# Altium PCB ALtiumSTM32_PCB.PcbDoc
Units mm, origin at the board's own origin, x right, y up, seen from the top; angles counter-clockwise.
Board outline 37.6 x 36.7 mm, 4 copper layers (L1 (Signal), L2 (GND), L3 (GND), L4 (Signal)), stack 1.57 mm thick; 35 components, 27 nets, 172 pads, 117 vias.
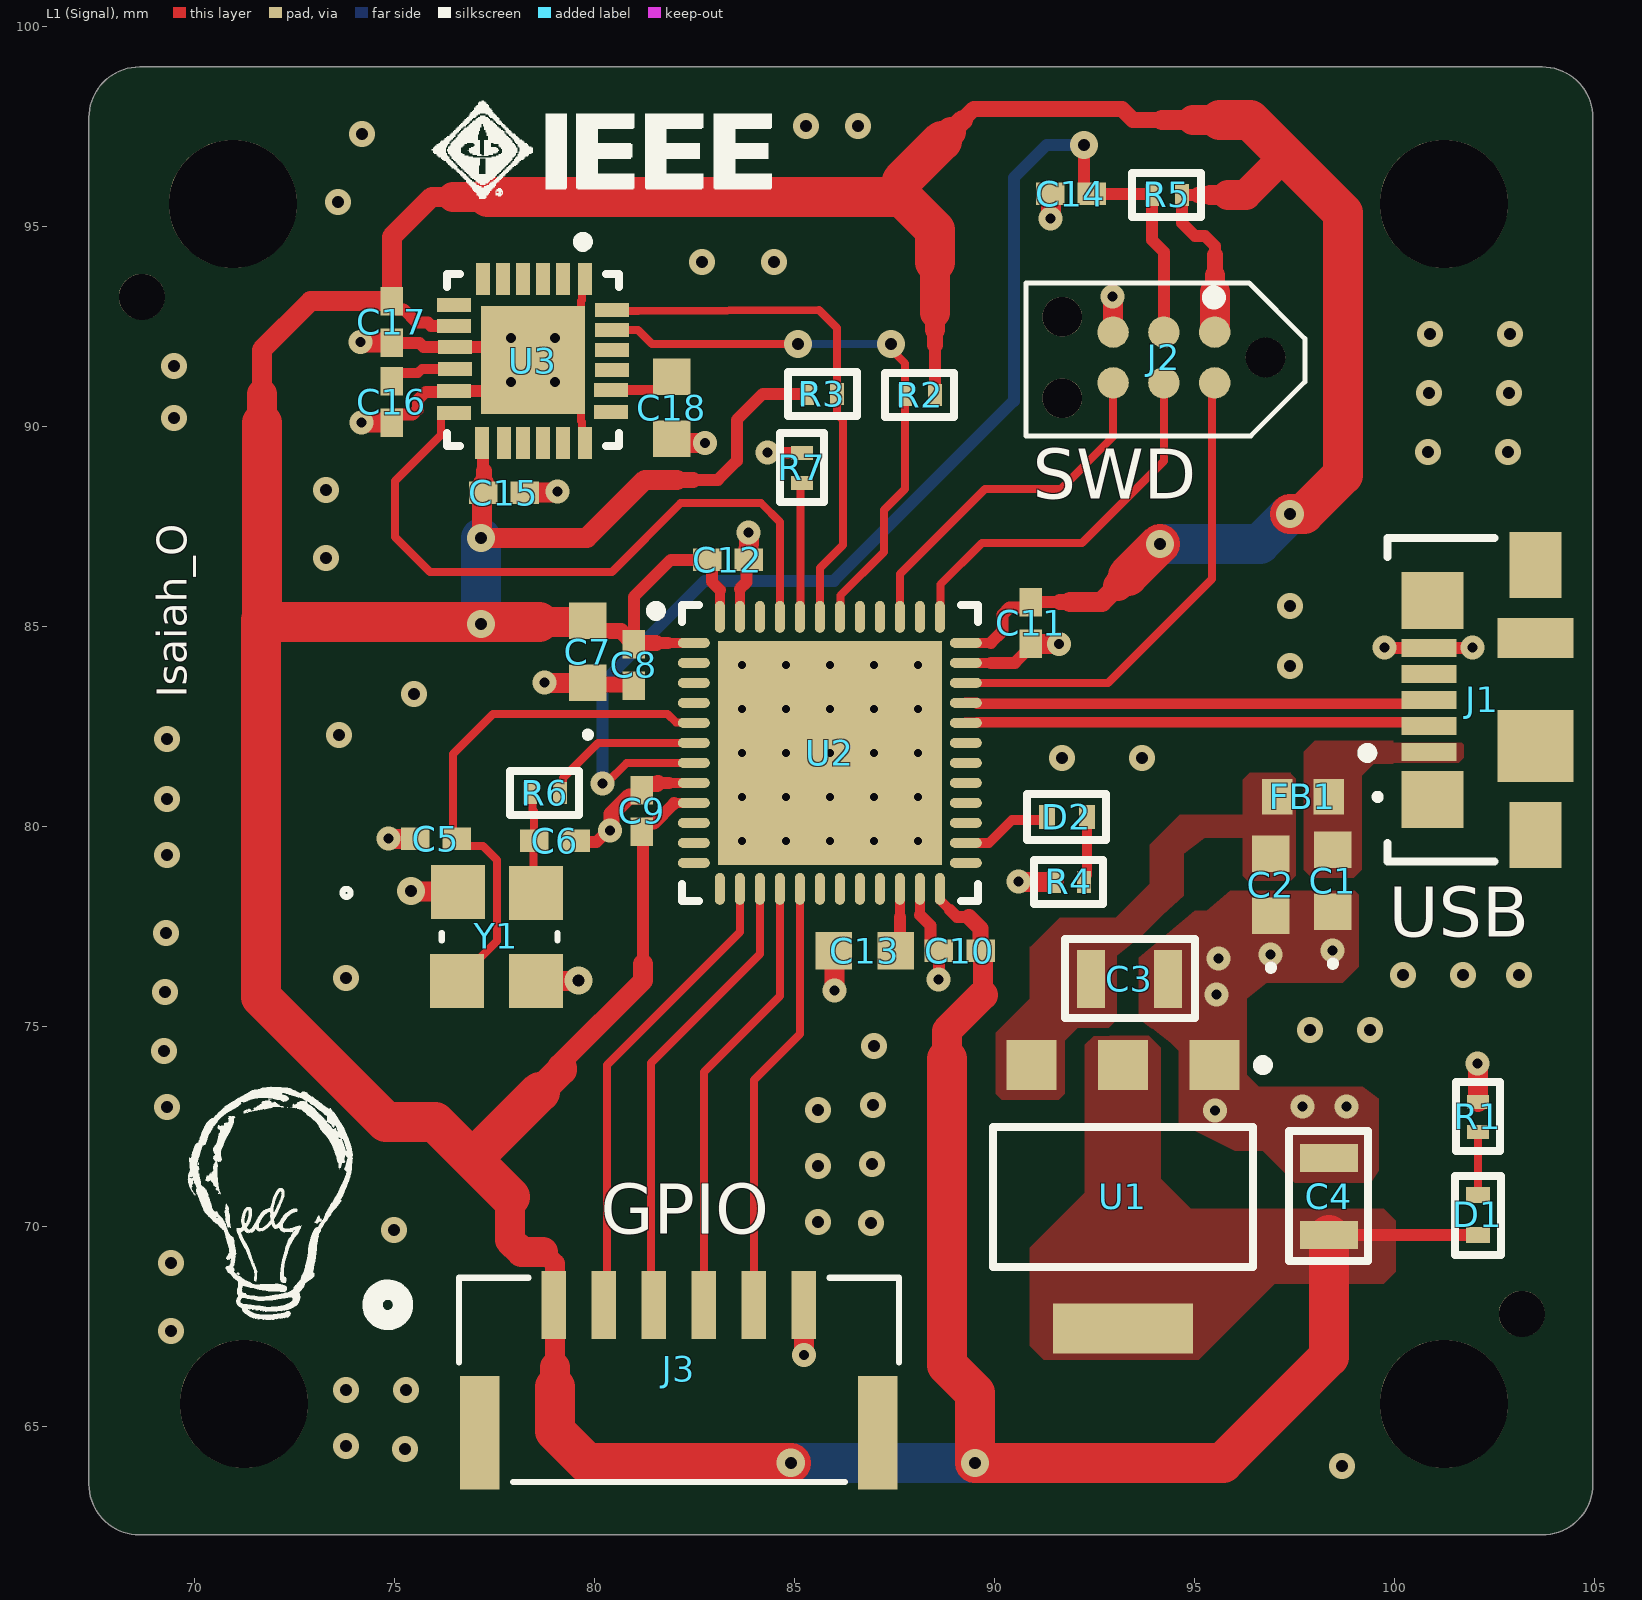
[diagram p0: L1 (Signal) view]
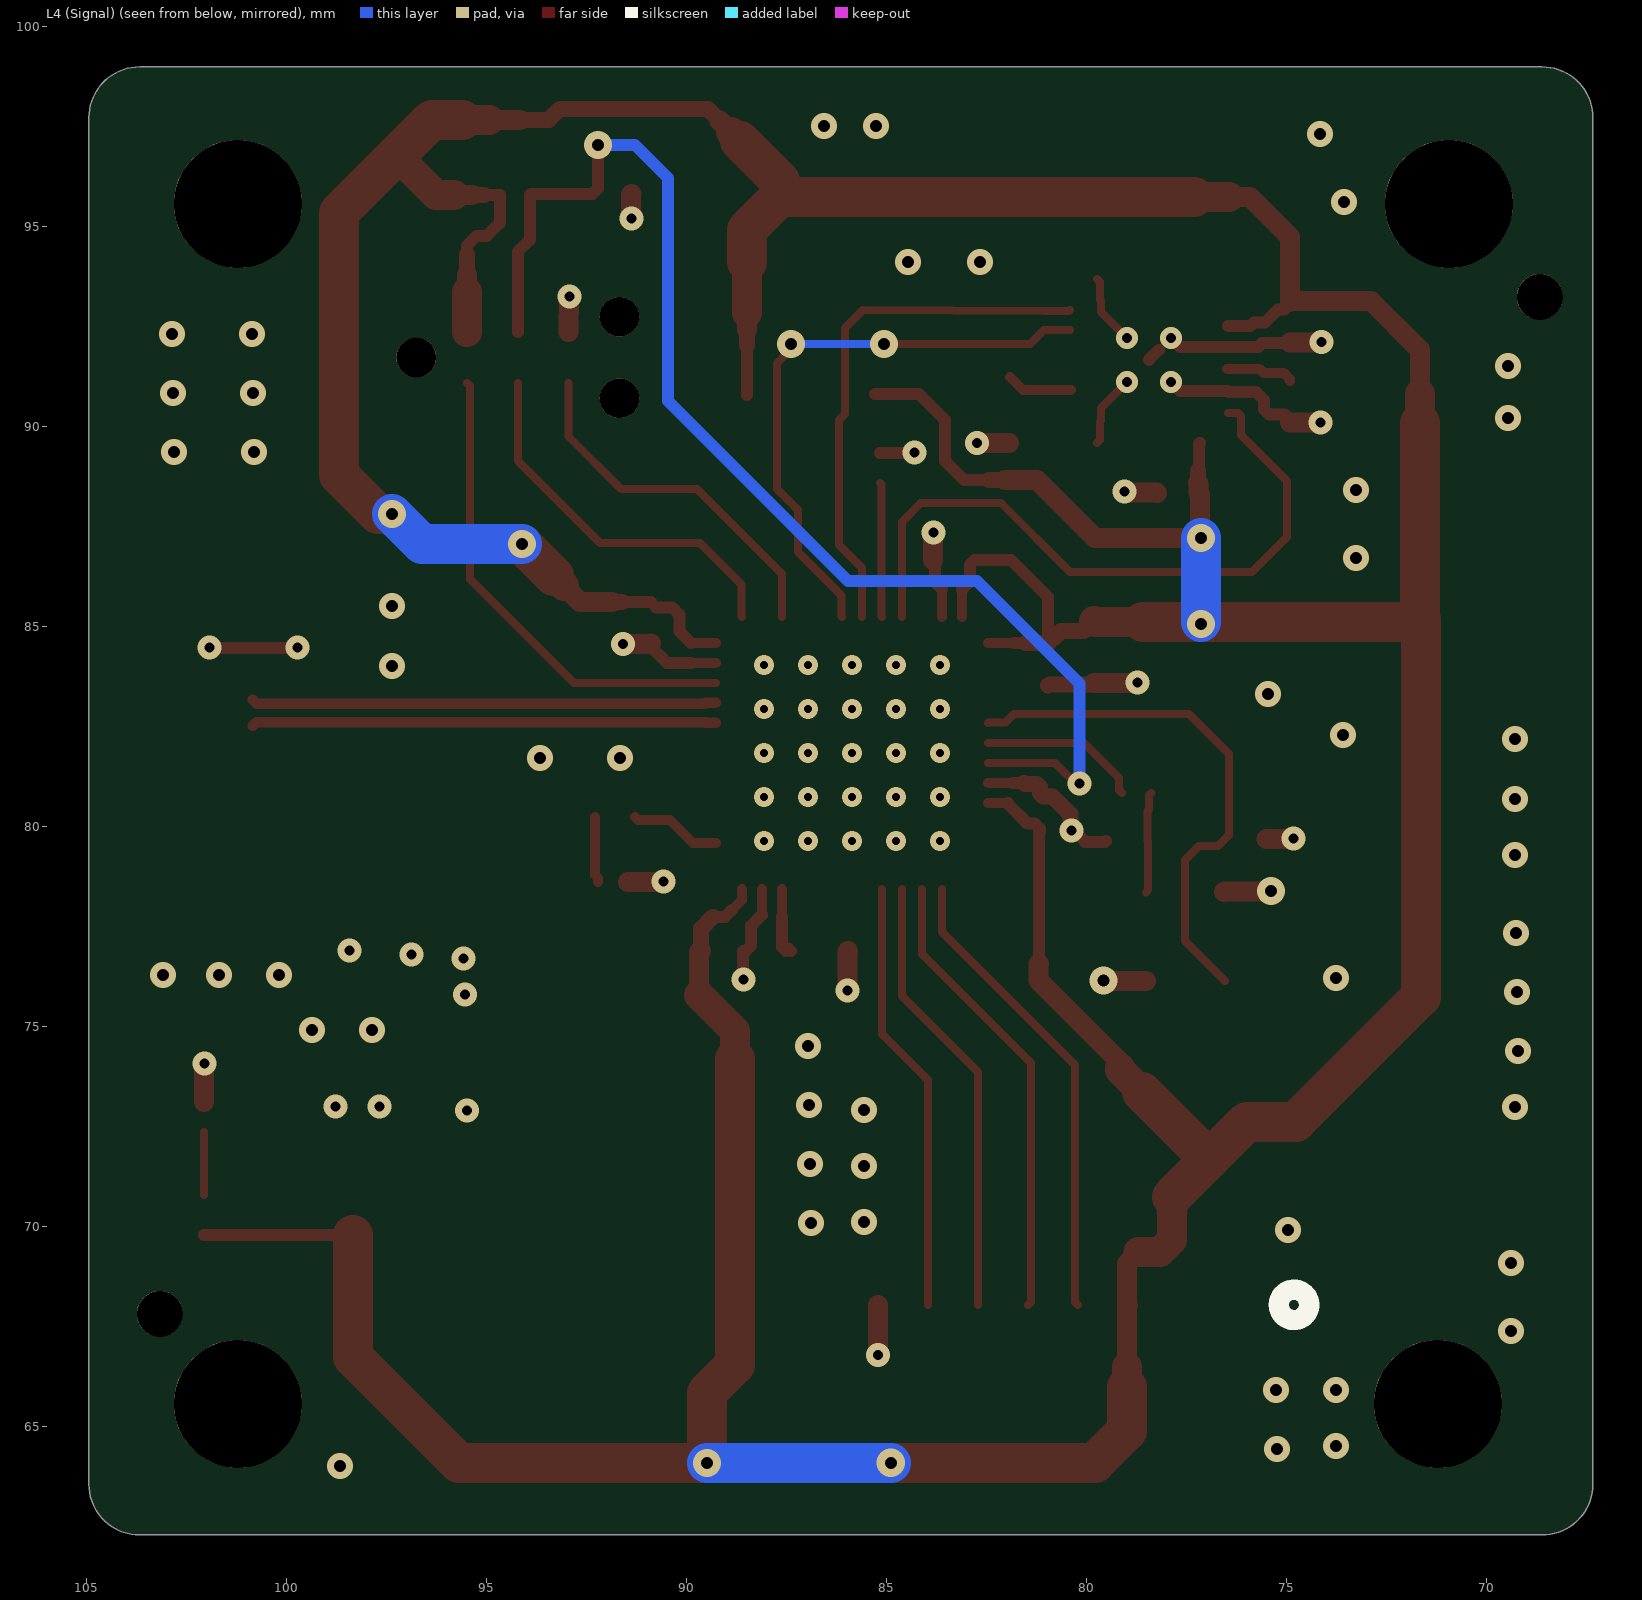
[diagram p1: L4 (Signal) view, seen from below]
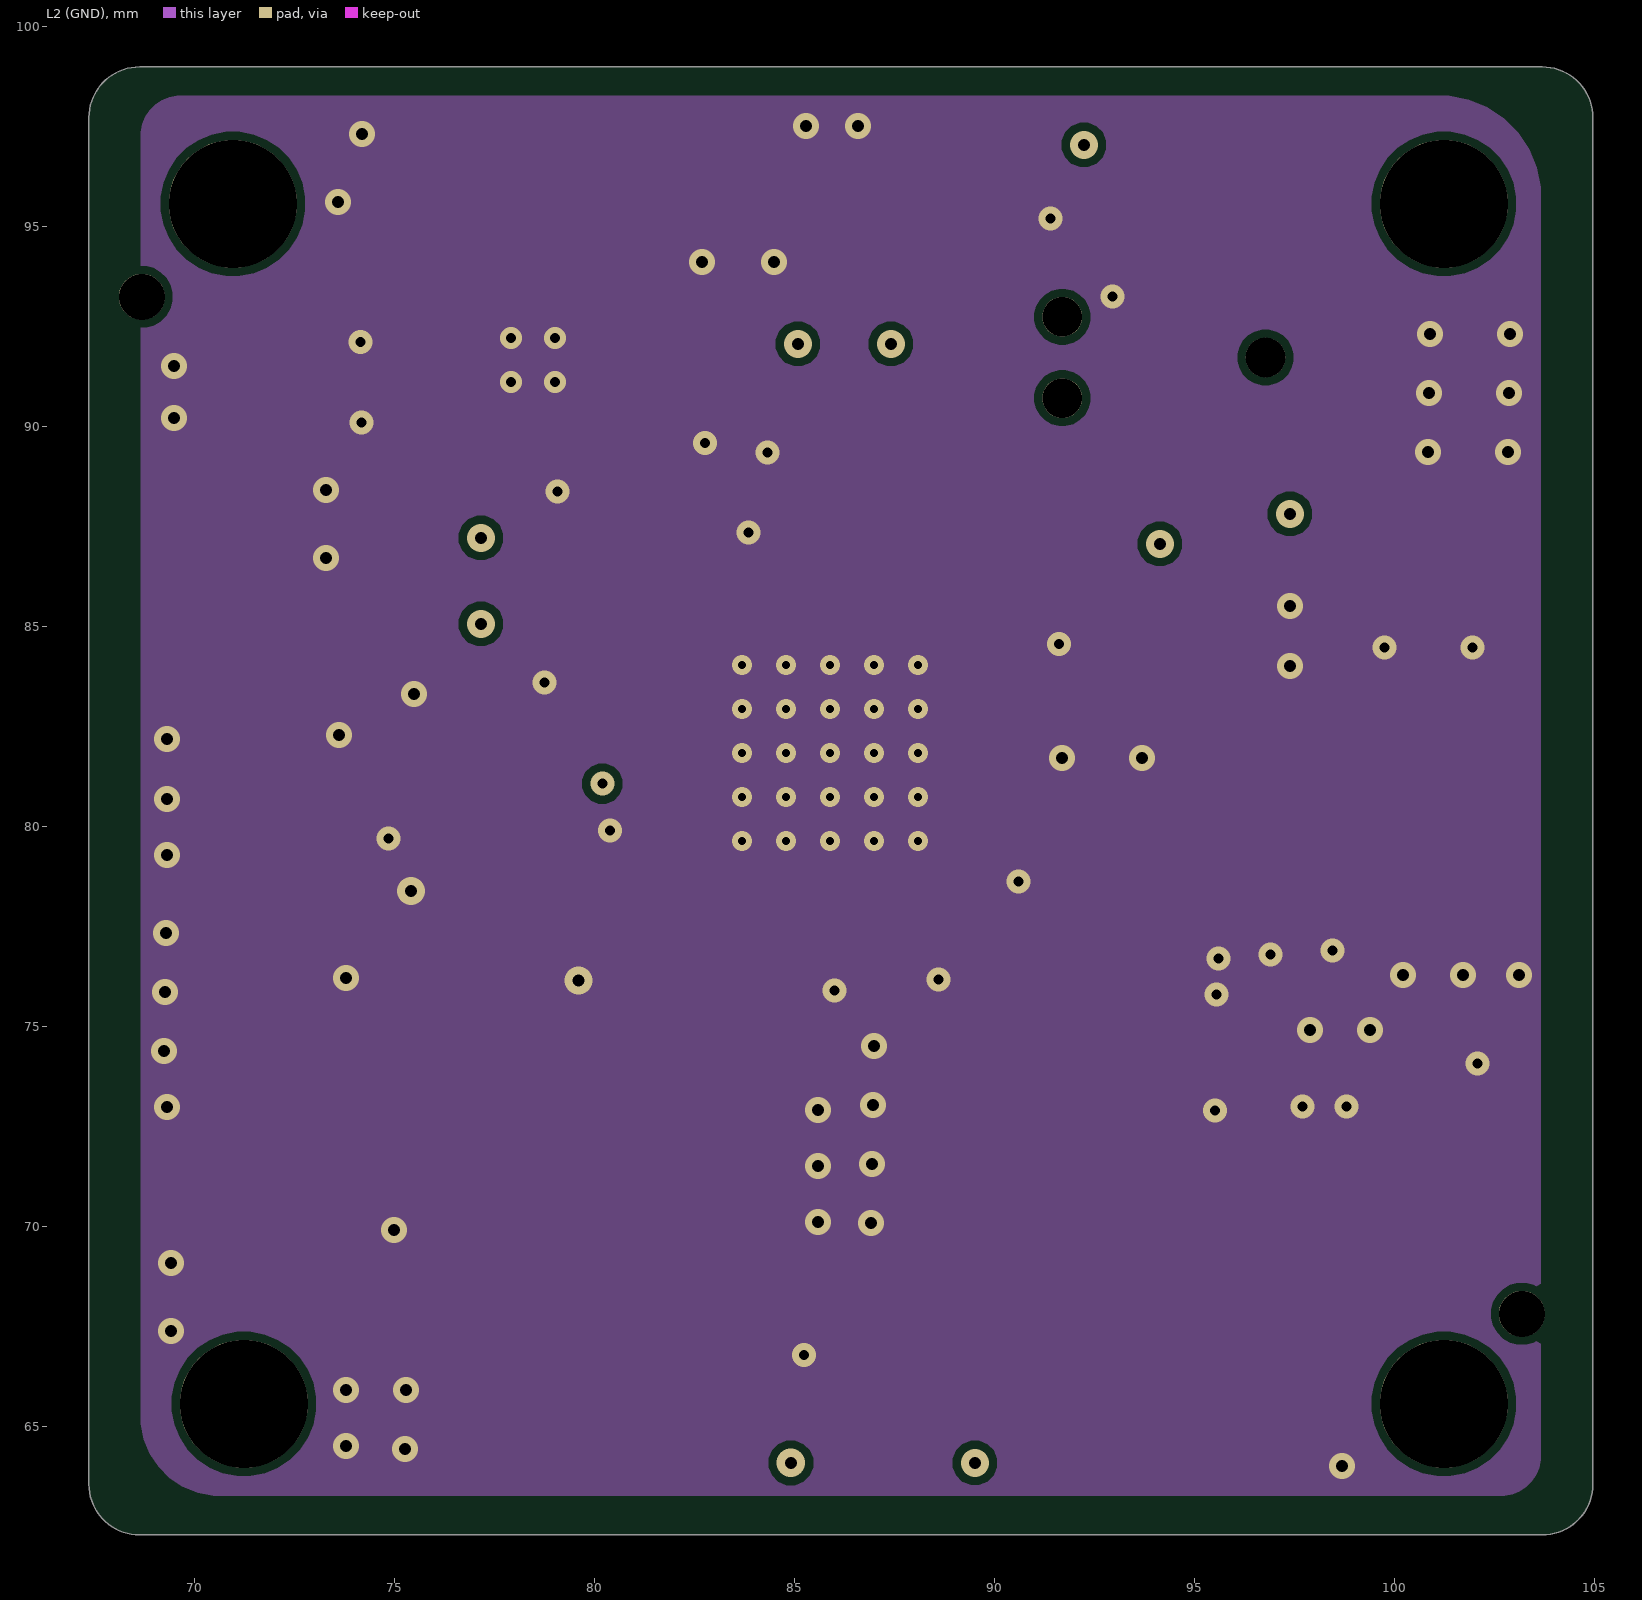
[diagram p2: L2 (GND)]
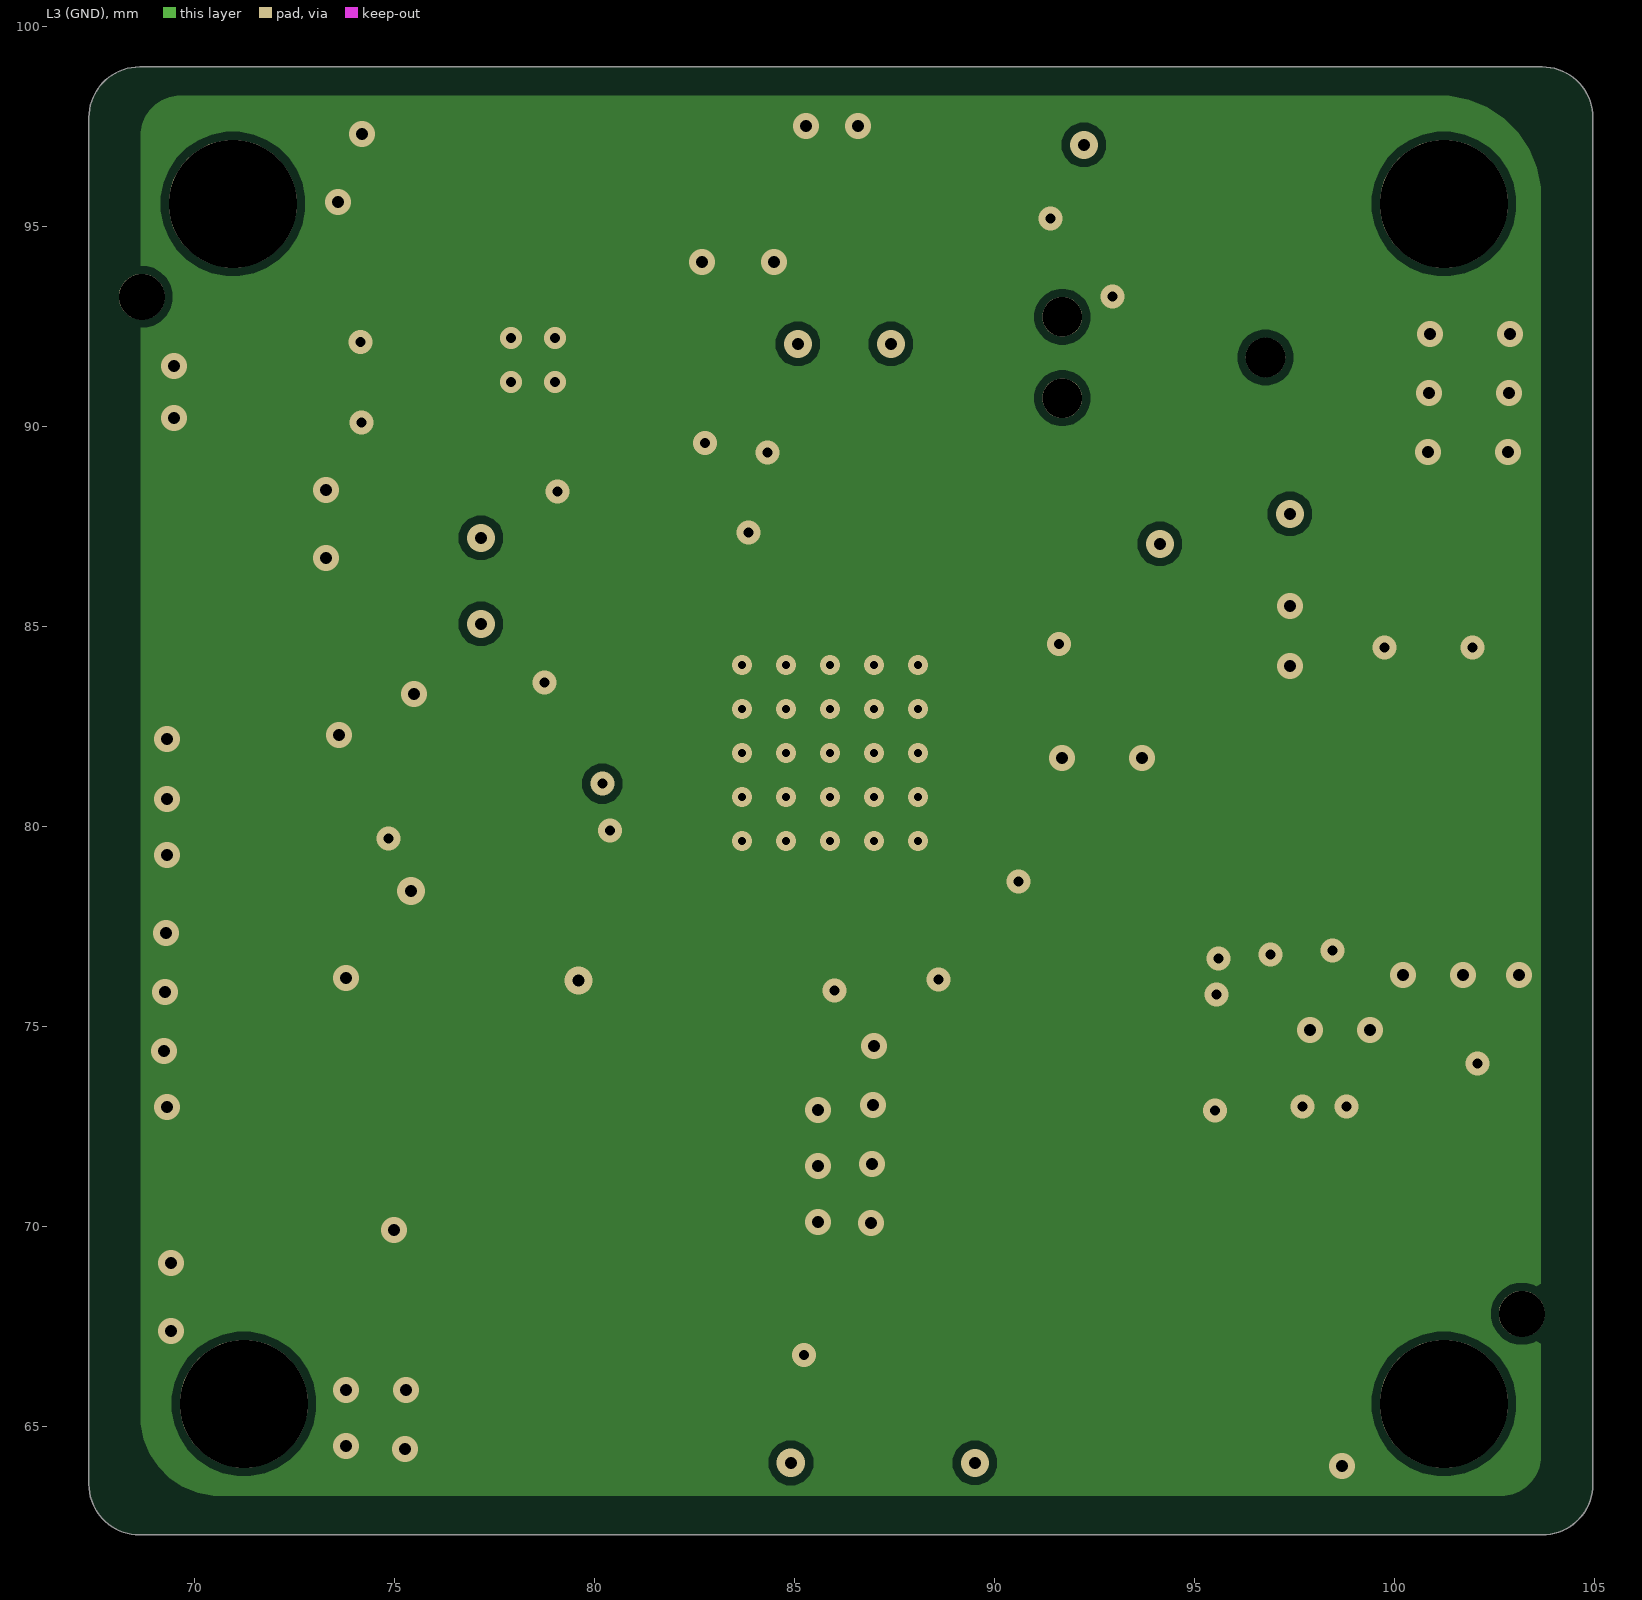
[diagram p3: L3 (GND)]
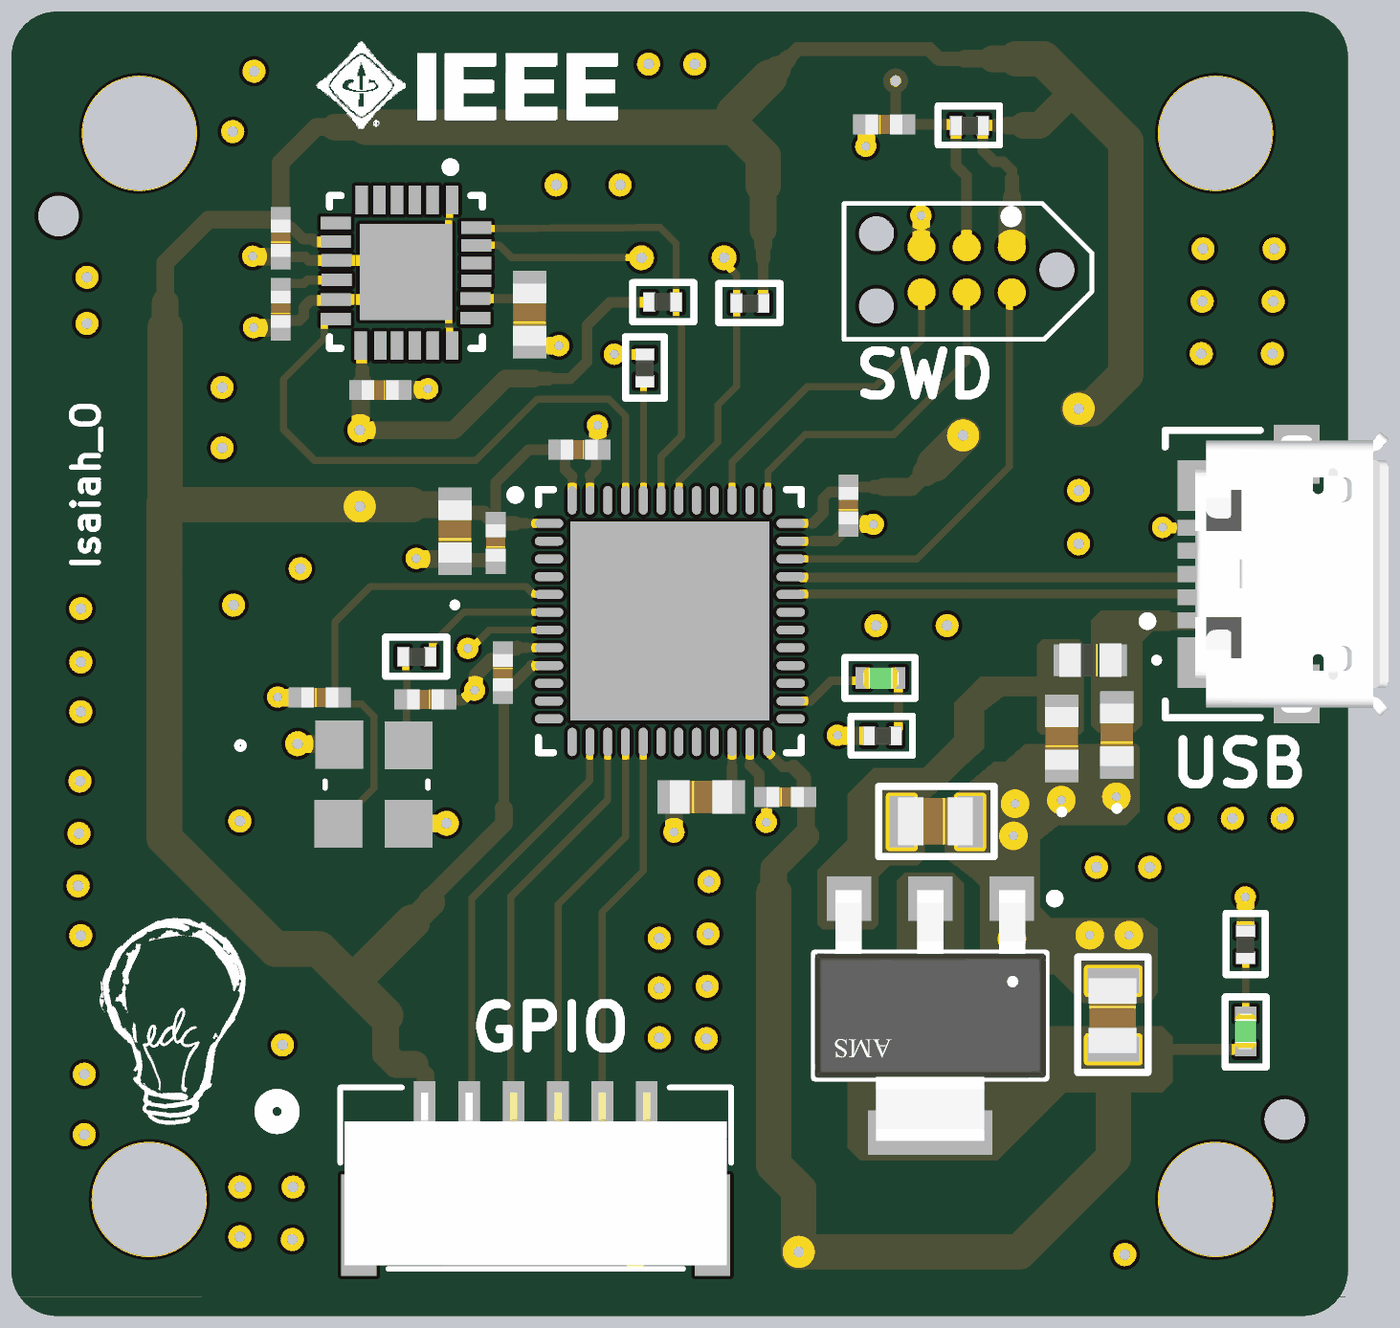
[diagram p4: 3D render of the assembled board from above, using the file's embedded part models]

## Layer stack, top to bottom
Top Solder: solder mask 0.0254, SM-001, Dk 4
L1 (Signal): signal copper 0.035
Dielectric 1: prepreg 0.2, PP-017, Dk 4.6
L2 (GND): signal copper 0.0175
Dielectric 3: core 1.065, Core-039, Dk 4.6
L3 (GND): signal copper 0.0175
Dielectric 5: prepreg 0.2, PP-017, Dk 4.6
L4 (Signal): signal copper 0.035
Bottom Solder: solder mask 0.0254, SM-001, Dk 4

## Board outline
67.35,63.57 ccw(c68.62,63.57) 68.62,62.3 103.68,62.3 ccw(c103.68,63.57) 104.95,63.57 104.95,97.73 ccw(c103.68,97.73) 103.68,99 68.62,99 ccw(c68.62,97.73) 67.35,97.73

## Design rules (kind name [scope] priority, off if disabled: settings)
Clearance [All] p1: gap=0.2 ignorepadtopadclearanceinfootprint=FALSE except(0: Arc-Hole Track-Hole SMDPad-Hole THPad-Hole Via-Hole Fill-Hole Poly-Hole Region-Hole Text-Hole)
DiffPairsRouting [All] p1: maxlimit=0.254 minlimit=0.203 mostfreqgap=0.254 toplayer_maxgap=0.203 toplayer_prefgap=0.203 toplayer_minwidth=0.26 toplayer_maxwidth=0.26 toplayer_prefwidth=0.26 bottomlayer_maxgap=0.203 bottomlayer_prefgap=0.203 bottomlayer_minwidth=0.26 bottomlayer_maxwidth=0.26 bottomlayer_prefwidth=0.26 impedanceprofiledriven=TRUE impedanceprofileid={747E20D5-6B99-424C-B61D-0ADEAD03E9EC} impedanceprofilevalue=90.000000 maxuncoupledlength=12.7
PolygonConnect [All] p1: connectstyle=Direct reliefconductorwidth=0.254 reliefentries=4 polygonreliefangle="90 Angle" airgapwidth=0.254
RoutingVias [All] p1: holewidth=0.3 width=0.7 viastyle="Through Hole" minholewidth=0.25 minwidth=0.55 maxholewidth=0.4 maxwidth=0.9
SolderMaskExpansion [All] p1: expansion=0.102 istentingtop=FALSE
UnRoutedNet [All] p1: checkbadconnections=TRUE
Width [All] p1: maxlimit=1 minlimit=0.2 preferedwidth=0.3 midlayer1_minwidth=0.254 midlayer1_maxwidth=0.254 midlayer1_prefwidth=0.254 midlayer2_minwidth=0.254 midlayer2_maxwidth=0.254 midlayer2_prefwidth=0.254 minimp=50.000000 maximp=50.000000 favimp=50.000000
28 further rules are at their usual default settings.

## Classes and differential pairs
differential pair class DIFF_USB: USB_D
differential pair USB_D: +USB_D_P -USB_D_N

## Components (designator, comment, footprint, x,y, rotation, side; value= is the part's Value field where it differs from the comment)
C1 "2u2" CAP_0603_X_WAL 98.45,78.65 r90 top
C2 "2u2" CAP_0603_X_WAL 96.9,78.55 r90 top
C3 "22u" C0805 93.35,76.2 r180 top
C4 "22u" C0805 98.35,70.75 r270 top
C5 "10p" CAP_CL_05_SAM_0402 76.025,79.7 r0 top
C6 "10p" CAP_CL_05_SAM_0402 79,79.65 r180 top
C7 "2u2" CAP_0603_X_WAL 79.825,84.375 r90 top
C8 "100n" CAP_CL_05_SAM_0402 80.975,84.05 r90 top
C9 "100n" CAP_CL_05_SAM_0402 81.175,80.4 r270 top
C10 "100n" CAP_CL_05_SAM_0402 89.121,76.9 r0 top
C11 "100n" CAP_CL_05_SAM_0402 90.9,85.1 r90 top
C12 "100n" CAP_CL_05_SAM_0402 83.325,86.675 r180 top
C13 "2u2" CAP_0603_X_WAL 86.75,76.9 r0 top
C14 "100n" CAP_CL_05_SAM_0402 91.9,95.825 r0 top
C15 "100n" CAP_CL_05_SAM_0402 77.725,88.35 r180 top
C16 "100n" CAP_CL_05_SAM_0402 74.925,90.625 r90 top
C17 "10n" CAP_CL_05_SAM_0402 74.925,92.625 r90 top
C18 "2u2" CAP_0603_X_WAL 81.925,90.475 r90 top
D1 "LED-0403-LED" D0402 102.075,70.3 r90 top
D2 "LED-0402-RED" D0402 91.8,80.25 r0 top
FB1 "120R" IND_BLM18_0603_MUR-L 97.702,80.75 r180 top
J1 "473460001" FP-473460001-MFG 103.16,83.175 r90 top
J2 "DNP" TAG_TC2030-IDC-NL 94.225,91.735 r180 top
J3 "SM068-GHS-TB" CONN_SM06B-GHS-TB_JST 82.1,66.175 r0 top
R1 "10k" R0402 102.075,72.75 r270 top
R2 "2k2" R0402 88.125,90.8 r0 top
R3 "2k2" R0402 85.675,90.825 r180 top
R4 "1k" R0402 91.85,78.625 r0 top
R5 "10k" R0402 94.3,95.8 r0 top
R6 "0R" R0402 78.75,80.85 r0 top
R7 "10k" R0402 85.175,88.975 r270 top
U1 "AMS1117-3.3" FP-AMS1117-IPC_C 93.2,70.75 r270 top
U2 "STM32F411CEU6" STM-UFQFPN48_L 85.875,81.85 r0 top
U3 "MPU-6050" IS-QFN-24_V 78.45,91.675 r270 top
Y1 "24MHz" "TSX-3225 24.0000MF20G-AC3_EPS-L" 77.62,77.25 r0 top

## Footprints (in the part's own frame and the unit in brackets; to place one, negate y for a bottom-side part, rotate by r counter-clockwise, add the part's x,y. Pads: shape width x height; smd on the part's side, far side on the other; paste and mask are expansions set on the pad)
C0805 [mm]
  rect 0.7x1.45 smd: 1(-0.975,0) 2(0.95,0)
  silkscreen extent -1.65,-1 1.6,0.97, body extent -1.05,-0.69 1.06,0.65, height 1.35
CAP_0603_X_WAL [mil]
  rect 36x37 smd paste+0 mask+0: 1(-30.5,0) 2(30.5,0)
  silkscreen extent -84,-3 -79,3, body extent -34,-19 34,19, height 37
CAP_CL_05_SAM_0402 [mil]
  rect 28x22 smd paste+0 mask+0: 1(-20.5,0) 2(20.5,0)
  body extent -21,-11 21,11, height 22
CONN_SM06B-GHS-TB_JST [mil]
  rect 24x67 smd paste+0 mask+0: 1(-123.03,73.85) 2(-73.82,73.85) 3(-24.61,73.85) 4(24.61,73.85) 5(73.82,73.85) 6(123.03,73.85)
  rect 39x112 smd: 7(-195.87,-52.14) 8(195.87,-52.14)
  silkscreen extent -301,-100 216,100, body extent -212,-96 212,94, height 168
D0402 [mm]
  rect 0.4x0.6 smd: A(-0.5,0) K(0.5,0)
  silkscreen extent -1,-0.58 0.97,0.58, body extent -0.49,-0.3 0.51,0.3, height 0.2
FP-473460001-MFG [mm]
  rect 0.45x1.38 smd paste+0 mask+0: 1(-1.3,2.31) 2(-0.65,2.31) 3(0,2.31) 4(0.65,2.31) 5(1.3,2.31)
  rect 1.425x1.55 smd paste+0 mask+0: 6(-2.488,2.225) 7(2.488,2.225)
  rect 1.65x1.3 smd paste+0 mask+0: 8(-3.375,-0.35) 11(3.375,-0.35)
  rect 1.8x1.9 smd paste+0 mask+0: 9(-1.15,-0.35)
  rect 1x1.9 smd paste+0 mask+0: 10(1.55,-0.35)
  silkscreen extent -4.05,0.67 4.05,3.97, body extent -4.3,-2.48 4.3,3.45, height 0.25
FP-AMS1117-IPC_C [mm]
  rect 1.25x1.25 smd paste+0 mask+0: 1(-3.295,2.29) 2(-3.295,0) 3(-3.295,-2.29)
  rect 1.25x3.5 smd paste+0 mask+0: 4(3.295,0)
  silkscreen extent -3.42,-3.25 1.75,3.63, body extent -3.9,-3.35 3.9,3.35, height 0.25
IND_BLM18_0603_MUR-L [mil]
  rect 30x35 smd paste+0 mask+0: 1(-25.5,0) 2(25.5,0)
  silkscreen extent -76,-3 -71,3, body extent -34,-19 34,19, height 37
IS-QFN-24_V [mm] "QFN, 24-Leads, Body 4x4mm, Pitch 0.5mm, Thermal Pad 2.7x2.6mm"
  rect 0.8x0.35 smd: 1(-2.025,1.3) 2(-2.025,0.75) 3(-2.025,0.25) 4(-2.025,-0.25) 5(-2.025,-0.75) 6(-2.025,-1.25) 13(2.075,-1.275) 14(2.075,-0.725) 15(2.075,-0.25) 16(2.075,0.25) 17(2.075,0.75) 18(2.075,1.3)
  rect 0.35x0.85 smd mask+0.102: 7(-1.375,-1.975) 8(-0.85,-1.975) 9(-0.325,-1.95) 10(0.225,-1.95) 11(0.775,-1.975) 12(1.325,-1.975) 19(1.3,1.95) 20(0.75,1.95) 21(0.25,1.975) 22(-0.25,1.975) 23(-0.75,1.975) 24(-1.25,1.975)
  rect 2.7x2.6 smd: 25(0,0)
  silkscreen extent -3.07,-2.15 2.15,2.15, body extent -2,-2 2,2, height 0.95
R0402 [mm]
  rect 0.35x0.55 smd: 1(-0.375,0) 2(0.375,0)
  silkscreen extent -0.87,-0.55 0.85,0.55, body extent -0.52,-0.26 0.54,0.25, height 0.71
STM-UFQFPN48_L [mm] "QFN, 48-Leads, Body 7.1x7.1mm, Pitch 0.5mm, Thermal Pad 5.6x5.6mm, IPC High Density"
  oval 0.8x0.25 smd: 1(-3.4,2.75) 2(-3.4,2.25) 3(-3.4,1.75) 4(-3.4,1.25) 5(-3.4,0.75) 6(-3.4,0.25) 7(-3.4,-0.25) 8(-3.4,-0.75) 9(-3.4,-1.25) 10(-3.4,-1.75) 11(-3.4,-2.25) 12(-3.4,-2.75) 25(3.4,-2.75) 26(3.4,-2.25) 27(3.4,-1.75) 28(3.4,-1.25) 29(3.4,-0.75) 30(3.4,-0.25) 31(3.4,0.25) 32(3.4,0.75) 33(3.4,1.25) 34(3.4,1.75) 35(3.4,2.25) 36(3.4,2.75)
  oval 0.25x0.8 smd: 13(-2.75,-3.4) 14(-2.25,-3.4) 15(-1.75,-3.4) 16(-1.25,-3.4) 17(-0.75,-3.4) 18(-0.25,-3.4) 19(0.25,-3.4) 20(0.75,-3.4) 21(1.25,-3.4) 22(1.75,-3.4) 23(2.25,-3.4) 24(2.75,-3.4) 37(2.75,3.4) 38(2.25,3.4) 39(1.75,3.4) 40(1.25,3.4) 41(0.75,3.4) 42(0.25,3.4) 43(-0.25,3.4) 44(-0.75,3.4) 45(-1.25,3.4) 46(-1.75,3.4) 47(-2.25,3.4) 48(-2.75,3.4)
  rect 5.6x5.6 smd: 49(0,0)
  silkscreen extent -4.47,-3.7 3.7,3.7, body extent -3.55,-3.55 3.55,3.55, height 0.6
TAG_TC2030-IDC-NL [mil]
  round 30.98 smd paste-39.37: 1(-50,-25) 2(-50,25) 3(0,-25) 4(0,25) 5(50,-25) 6(50,25)
  round 39.02 hole 39.02 unplated: ""(-100,0) ""(100,-40) ""(100,40)
  silkscreen extent -139,-73 136,77
"TSX-3225 24.0000MF20G-AC3_EPS-L" [mil]
  rect 53x53 smd paste+0 mask+0: 1(-42.12,-43.31) 2(-41.14,44.29) 3(35.63,-43.31) 4(35.63,43.31)
  silkscreen extent -155,-4 57,47, body extent 0,0 10,10, height 10

## Part data
C1 C2 C7 C13 C18: library part CAP_0603_16V
C3 C4: library part CAP_0805_16V, "CAP_SMD 0805 16V"
C5 C6: library part CAP_0402_50V, "0402 50V 10PF"
C8 C9 C10 C11 C12 C14 C15 C16 C17: library part CAP_0402_16V
D1: "LED-0402 green smd"
D2: "LED-0402 red smd"
FB1: library part FB_0603, "Ferrite Beead SMD 0603"
J1: library part CMP-2000-05246-2, "CONN RCPT USB2.0 MICRO B SMD R/A", Current Rating=1.8A, Manufacturer=Molex, Package=0, Temperature="-30°C to +85°C", Temperature Range High=+85°C, Temperature Range Low=-30°C, Voltage Rating=30V, Automotive=No, Category=Conn, ComponentLink2Description=Datasheet, ComponentLink2URL=https://www.molex.com/webdocs/datasheets/pdf/en-us/0473460001_IO_CONNECTORS.pdf, Conn Orientation="Right Angle", Contact Material=Gold,Nickel, Device Class L1=Connectors, Device Class L2="USB Connectors", Device Class L3=unset, Digikey Description="CONN RCPT USB2.0 MICRO B SMD R/A", Footprint Url=https://www.molex.com/pdm_docs/sd/473460001_sd.pdf, Height=2.945mm, Is Female=yes, Lead Free=Yes, Manufacturer Part Number=473460001, Number Of Contacts=5, Octopart=https://octopart.com/47346-0001-molex-7164928, Pitch=0.65mm, RoHS=TRUE, Shielding=true, Usb Standard="USB 2.0"
J2: library part TC2030-NL, "TC2030-NL smd"
R1 R2 R3 R4 R5 R6 R7: library part RES_0402
U1: library part CMP-209535-000001-1, "LDO Voltage Regulators 1A, 3.3V", Dropout Voltage=1.1V, Manufacturer="Advanced Monolithic Systems", Max Junction Temp=+125°C, Max Power Dissipation=1.2W, Max Supply Voltage=15V, Nominal Supply Current=5mA, Output Current=1A, Output Voltage=3.3V, Package=AMS1117, Temperature="-40°C to +125°C", Temperature Range Low=-40°C, Automotive=No, Category=IC, ComponentLink2Description=Datasheet, ComponentLink2URL=http://www.advanced-monolithic.com/pdf/ds1117.pdf, Device Class L1="Integrated Circuits (ICs)", Device Class L2="Power Management ICs", Device Class L3="Voltage Regulators - Linear", Height=1.8mm, Ipc Land Pattern Name=SOT229P700X180-4, Lead Free=Yes, Manufacturer Part Number=AMS1117-3.3, Number Of Outputs=1, Octopart=https://octopart.com/ams1117-3.3-advanced+monolithic+systems-25899300, Output Type=Fixed, RoHS=TRUE, Standoff Height=0.64mm, Temperature Range High=+125°C
U2: library part CMP-0243-00165-1, "ARM Cortex-M4 32-bit MCU+FPU, 512 KB Flash, 128 KB RAM, 36 I/Os, 48-Pin UFQFPN, -40 to 85 degC, Tray", I/Os (High Current)=36, Operating Frequency(F) (Processor speed) (MHz)=100, Package Description=UFQFPN48, Package Reference="48-Pin Ultra Thin Fine Pitch Quad Flat No-Lead, 7 x 7 x 0.6 mm Body, 0.5 mm Pitch, Exposed Pad", Supply Voltage(Vcc) min (V)=1.7, ComponentLink1Description="Manufacturer URL", ComponentLink1URL=http://www.st.com/, ComponentLink2Description=Datasheet, ComponentLink2URL=http://www.st.com/st-web-ui/static/active/en/resource/technical/document/datasheet/DM00115249.pdf, Core="ARM Cortex-M4", DatasheetVersion="Rev. 6", FLASH Size (Prog) (kB)=512, Internal RAM Size (kB)=128, Mounting Technology="Surface Mount", Packing=Tray
U3: library part CMP-1753-00002-2, "3-Axis Gyroscope, Accelerometer and a Digital Motion Processor(TM) (DMP), 2.375 to 3.46 V, -40 to 85 degC, 24-Pin QFN, RoHS, Tape and Reel", Manufacturer=InvenSense, Standard Package=5,000, Category=Sensors,Transducers, Datasheet URL=http://datasheet.octopart.com/MPU-6050-InvenSense-datasheet-14421344.pdf, Datasheet Version="Rev. 3.3, 05/2012", Dynamic Catalog=MPU-6000™Series, Family=Multifunction, Featured Product=MPU-60506-Axis,IntegratedI²CSolution, Manufacturer URL=http://www.invensense.com/, Online Catalog=MPU-6000™Series, Other Names="1428-1007-2 / MPU6050", Output Type=Digital, Sensor Type=MotionTracking, Unit PriceUSD=Digital
Y1: library part TSX-3225_24.0000MF20G_AC3

## Free pads (board coordinates)
  round 3.2 hole 3.2: MH(70.95,95.575) MH(71.225,65.575) MH(101.225,65.575) MH(101.225,95.575)
  round 1.152 hole 1.152 unplated: TH(68.675,93.25) TH(103.175,67.825)

## Via types
v1: diameter 0.65, hole 0.3, L1 (Signal) to L4 (Signal), 50 vias
v2: diameter 0.6, hole 0.25, L1 (Signal) to L4 (Signal), 27 vias
v3: diameter 0.5, hole 0.2, L1 (Signal) to L4 (Signal), 25 vias
v4: diameter 0.7, hole 0.3, L1 (Signal) to L4 (Signal), 10 vias
v5: diameter 0.55, hole 0.25, L1 (Signal) to L4 (Signal), 4 vias
v6: diameter 0.711, hole 0.3, L1 (Signal) to L4 (Signal), 1 vias

## Nets (pads, with @x,y where several pads share a name; then routed paths per layer and width w, separated by ;. In a path a pad name is that pad's centre, name@x,y a point inside that pad or via, vN(x,y) a via of type N, cw(c..) or ccw(c..) an arc to the next point about the centre after c; other vN are vias at no path point)
+3V3: C4.2 C7.2 C8.2 C9.2 C10.2 C11.2 C12.2 C15.2 C17.2 D1.A J2.1 J3.1 R2.2 R3.2 R5.2 U1.2 U1.4 U2.1 U2.9 U2.24 U2.36 U2.48 U3.8 U3.13 | length 180.4
  L1 (Signal) w0.25: 81.825,84.6 U2.1 ; 81.975,80.6 U2.9 ; U2.48 83.125,85.925 ; U2.24 88.625,78.175 88.875,77.925 ; U2.36 89.9,84.6
  L1 (Signal) w0.3: C17.2 74.925,93.116 74.925,93.069 75.054,92.94 75.219,92.94 75.554,92.605 75.825,92.605 75.905,92.525 U3.8 ; U3.13 77.2,89.575 77.2,88.925 77.225,88.9 ; C8.2 80.975,84.647 80.975,85.75 81.9,86.675 C12.2 82.925,86.554 82.925,86.125 83.125,85.925 ; 81.2,76.575 81.2,79.854 C9.2 81.175,79.955 81.304,80.085 81.484,80.085 81.975,80.576 81.975,80.6 ; 81.525,84.6 81.825,84.6 ; 82.45,88.675 83.075,88.675 83.55,89.15 83.55,90.175 84.2,90.825 R3.2 ; R2.2 88.5,92.05 ; 88.875,77.925 89.05,77.75 89.35,77.75 ; 89.9,84.6 90.19,84.89 90.19,85.308 90.366,85.483 C11.2@90.771,85.483 ; C11.2 91.621,85.621 91.625,85.625 ; 95.075,95.8 R5.2 94.675,95.1 95,94.775 95.25,94.775 95.5,94.525 95.5,94.3 ; C4.2 D1.A
  L1 (Signal) w0.4: C15.2@77.225,88.6 77.225,88.9 ; C7.2 80.082,84.892 80.653,84.892 80.819,84.726 80.896,84.726 C8.2@80.975,84.647 ; C8.2 81.004,84.6 81.525,84.6 ; 82.05,88.675 82.45,88.675 ; 88.5,92.05 88.5,92.425 ; 89.2,97.675 89.475,97.95 93.175,97.95 93.45,97.675 94.175,97.675 ; 89.35,77.75 89.641,77.459 C10.2 ; 91.625,85.625 91.875,85.625 ; 95.075,95.8 95.375,95.8 ; 95.5,93.8 95.5,94.3
  L1 (Signal) w0.5: 71.675,90.825 71.675,91.925 72.896,93.146 74.896,93.146 C17.2@74.925,93.116 ; C17.2 74.925,94.75 75.925,95.75 76.45,95.75 ; C15.2@77.225,88.6 77.204,88.579 C15.2 77.177,88.323 77.177,87.252 v4(77.15,87.225) 79.8,87.225 81.25,88.675 82.05,88.675 ; 77.875,69.668 77.875,69.675 ; 78.707,69.375 79,69.082 79,68.076 J3.1 79,68.026 79,66.5 ; 79.175,73.975 79.175,74.125 81.205,76.155 81.205,76.57 81.2,76.575 ; 88.5,92.425 88.5,92.85 ; 88.9,97.375 89.2,97.675 ; C10.2 89.671,76.9 89.7,76.871 89.7,75.8 ; 91.875,85.625 92.675,85.625 93.075,86.025 ; 94.175,97.675 94.95,97.675 ; 95.375,95.8 95.825,95.8 ; 95.5,93.375 95.5,93.8
  L1 (Signal) w0.75: 71.675,90.1 71.675,90.825 ; 76.45,95.75 77.325,95.75 ; 77.875,69.668 78.168,69.375 78.707,69.375 ; 77.875,69.675 77.875,70.75 ; 78.6,85.125 79.8,85.125 C7.2 ; 78.625,73.375 79.175,73.925 79.175,73.975 ; 79,66 79,66.5 ; 88.5,92.85 88.5,94.125 ; 88.675,97.15 88.9,97.375 ; 88.8,74.2 88.8,74.9 89.7,75.8 ; 93.075,86.025 93.325,86.275 ; 94.95,97.675 95.625,97.675 ; J2.1 95.5,92.375 95.5,93.375 ; 95.825,95.8 96.275,95.8 97.175,96.7 97.35,96.7
  L1 (Signal) w1: 71.675,90.1 71.675,85.15 ; 77.325,95.75 87.675,95.75 ; 77.875,70.75 76.937,71.687 ; 78.6,85.125 77.15,85.125 71.7,85.125 71.675,85.15 ; 78.625,73.375 76.937,71.687 ; 79,66 79,64.9 79.8,64.1 v6(84.9,64.1) ; 88.5,94.125 88.5,94.925 87.675,95.75 ; 88.675,97.15 87.675,96.15 87.675,95.75 ; 88.8,74.2 88.8,66.55 89.5,65.85 v4(89.5,64.1) 95.7,64.1 98.35,66.75 C4.2 ; 93.325,86.275 v4(94.125,87.075) ; 95.625,97.675 96.375,97.675 97.35,96.7 98.7,95.35 98.7,88.8 97.725,87.825 v4(97.375,87.825) ; 71.675,85.15 71.65,85.175 71.65,75.75 74.775,72.625 76,72.625 76.937,71.687
  L4 (Signal) w1: v4@77.15,85.125 v4(77.15,87.225) ; v6(84.9,64.1) v4(89.5,64.1) ; v4(94.125,87.075) 96.625,87.075 v4(97.375,87.825)
  other v4: 77.15,85.075
+5V: C2.2 C3.2 FB1.2 U1.3
GND: C1.1 C2.1 C3.1 C4.1 C5.1 C6.1 C7.1 C8.1 C9.1 C10.1 C11.1 C12.1 C13.1 C14.1 C15.1 C16.1 C17.1 C18.1 J1.5 J2.5 J3.6 R1.1 R4.1 R7.1 U1.1 U2.8 U2.23 U2.35 U2.47 U2.49 U3.1 U3.9 U3.11 U3.18 U3.25 Y1.2 Y1.3 | length 38.8
  L1 (Signal) w0.2: v5(79,91.125) 79.65,90.475 79.65,90.149 79.675,90.124 79.675,89.675 U3.18 ; v5(79,92.225) 79.65,92.875 79.65,93.151 79.675,93.176 79.675,93.625 U3.1
  L1 (Signal) w0.25: 81.85,81.1 U2.8 ; U2.47 83.625,85.95 ; 88.125,77.8 U2.23 ; U2.35 89.9,84.1
  L1 (Signal) w0.3: C16.1 74.925,90.181 75.054,90.31 75.444,90.31 75.575,90.441 75.575,90.675 75.775,90.875 76.45,90.875 U3.11 77.675,90.9 v5(77.9,91.125) ; C17.1 74.929,92.1 75.613,92.1 75.713,92 U3.9 77.675,92 v5(77.9,92.225) ; U3.25@78.2,91.925 U3.25 ; C6.1 79.546,79.625 80.044,79.625 80.294,79.875 v2@80.375,79.875 ; 81.575,81.1 81.85,81.1 ; 83.625,85.95 83.796,86.121 83.796,86.626 C12.1 ; v2@84.325,89.35 R7.1 ; 88.125,77.8 88.394,77.531 88.394,77.029 88.524,76.9 C10.1 v2@88.6,76.175 ; 89.9,84.1 90.497,84.1 90.9,84.503 C11.1 ; v2@99.75,84.475 J1.5 v2@101.95,84.475
  L1 (Signal) w0.4: C7.1 79.861,83.565 80.94,83.565 C8.1 ; v2@80.375,79.875 80.413,79.913 80.413,80.318 80.86,80.765 81.096,80.765 81.175,80.844 C9.1 81.175,80.997 81.254,81.076 81.551,81.076 81.575,81.1
  L1 (Signal) w0.5: v2(74.137,92.117) 74.144,92.111 74.919,92.111 C17.1 ; v2@74.175,90.1 74.175,90.104 C16.1 ; v2@74.85,79.7 C5.1 ; v4(75.4,78.4) 75.412,78.388 76.562,78.388 Y1.2 ; C15.1 78.258,88.363 79.063,88.363 v2@79.075,88.375 ; Y1.3 v4@79.6,76.15 ; v2@78.75,83.6 C7.1 ; C18.1@81.95,89.6 v2(82.75,89.6) ; C12.1 v2@83.852,87.35 ; v2(85.225,66.8) J3.6 ; C13.1 85.988,76.888 v2(85.988,75.912) ; v2@90.6,78.625 R4.1 ; C11.1 90.902,84.577 91.598,84.577 v2(91.6,84.575) ; C14.1 91.4,95.804 v2@91.4,95.2 ; v2@92.95,93.25 J2.5 ; R1.1 v2@102.075,74.075
  other v1: 98.675,64.025 75.25,64.45 73.775,64.525 73.775,65.925 75.275,65.925 69.4,67.4 69.4,69.1 74.975,69.925 86.9,70.1 85.575,70.125 85.575,71.525 86.925,71.575 85.575,72.925 69.3,73 86.95,73.05 69.225,74.4 86.975,74.525 97.875,74.925 99.375,74.925 69.25,75.875 73.775,76.225 100.2,76.3 101.7,76.3 103.1,76.3 69.275,77.35 69.3,79.3 69.3,80.7 91.675,81.725 93.675,81.725 69.3,82.2 73.6,82.3 75.475,83.325 97.375,84.025 97.375,85.525 73.275,86.725 73.275,88.425 100.825,89.375 102.825,89.375 69.475,90.225 100.85,90.85 102.85,90.85 69.475,91.525 100.875,92.325 102.875,92.325 82.675,94.125 84.475,94.125 73.575,95.625 74.175,97.325 85.275,97.525 86.575,97.525
  other v2: 95.498,72.907 97.688,73.012 98.788,73.012 102.063,74.087 95.542,75.809 88.588,76.187 95.587,76.712 96.887,76.812 98.437,76.908 90.587,78.637 74.838,79.712 80.382,79.907 78.738,83.613 99.738,84.487 101.937,84.487 83.839,87.362 79.063,88.387 84.313,89.363 74.163,90.112 92.938,93.262 91.388,95.212
  other v3: 83.675,79.65 84.775,79.65 85.875,79.65 86.975,79.65 88.075,79.65 83.675,80.75 84.775,80.75 85.875,80.75 86.975,80.75 88.075,80.75 83.675,81.85 84.775,81.85 85.875,81.85 86.975,81.85 88.075,81.85 83.675,82.95 84.775,82.95 85.875,82.95 86.975,82.95 88.075,82.95 83.675,84.05 84.775,84.05 85.875,84.05 86.975,84.05 88.075,84.05
  other v4: 79.588,76.162
IMU_CPOUT: C18.2 U3.20 | length 1.7
  L1 (Signal) w0.25: U3.20 81.6,90.925 C18.2
IMU_INT: U2.45 U3.12 | length 17.1
  L1 (Signal) w0.2: U3.12 76.225,90.35 76.15,90.275 76.15,89.8 75,88.65 75,87.25 75.875,86.375 80.425,86.375 82.143,88.093 84.157,88.093 84.625,87.625 U2.45
IMU_REGOUT: C16.2 U3.10 | length 1.7
  L1 (Signal) w0.25: C16.2 74.925,91.198 75.079,91.353 75.579,91.353 75.677,91.45 U3.10
IMU_SCL: R2.1 U2.42 U3.23 | length 14.8
  L1 (Signal) w0.2: U3.23 81.075,92.425 81.425,92.075 v4(85.075,92.075) ; U2.42 86.135,85.26 86.135,85.785 87.225,86.875 87.225,87.925 87.75,88.45 R2.1 87.75,91.59 87.4,91.94 v4(87.4,92.075)
  L4 (Signal) w0.2: v4(85.075,92.075) v4(87.4,92.075)
IMU_SDA: R3.1 U2.43 U3.24 | length 13.3
  L1 (Signal) w0.2: U3.24 80.45,92.9 81.075,92.9 85.6,92.925 86.05,92.475 R3.1 86.05,90.325 86.2,90.175 86.2,87.05 85.625,86.475 85.625,86.1 U2.43
LED_PWR_K: D1.K R1.2 | length 1.6
  L1 (Signal) w0.2: D1.K R1.2
MCU_BOOT0: R7.2 U2.44 | length 3.4
  L1 (Signal) w0.2: U2.44 85.135,85.26 85.135,88.56 R7.2
MCU_LED_A: D2.A U2.26 | length 2.3
  L1 (Signal) w0.2: U2.26 U2.26@89.285,79.61
  L1 (Signal) w0.25: U2.26 89.85,79.6 90.425,80.175 91.225,80.175 D2.A
MCU_LED_K: D2.K R4.2 | length 1.7
  L1 (Signal) w0.25: R4.2 92.225,78.725 92.3,78.8 D2.K
MCU_NRST: C14.2 J2.3 R5.1 U2.7 | length 32.3
  L1 (Signal) w0.2: v2(80.188,81.083) 80.278,81.083 80.795,81.6 U2.7
  L1 (Signal) w0.3: v4@92.25,97.025 v4(92.225,97.05) 92.225,95.954 92.354,95.825 C14.2 93.9,95.825 R5.1 93.925,94.675 94.225,94.375 J2.3
  L4 (Signal) w0.3: v2(80.188,81.083) 80.188,83.588 82.75,86.15 85.975,86.15 90.475,90.65 90.475,96.225 91.3,97.05 v4(92.225,97.05)
MCU_OSC_IN: C5.2 U2.5 Y1.1 | length 13.4
  L1 (Signal) w0.2: Y1.1 77.55,77.15 77.55,79.17 77.2,79.521 76.725,79.521 C5.2 76.45,79.796 76.45,81.825 77.45,82.825 81.818,82.825 82.034,82.61 82.465,82.61 U2.5
MCU_OSC_OUT: R6.2 U2.6 | length 4
  L1 (Signal) w0.2: R6.2 79.2,80.925 79.2,81.225 80.075,82.1 U2.6
MCU_PA4: J3.2 U2.14 | length 11.8
  L1 (Signal) w0.2: J3.2 80.3,68.126 80.3,74.05 83.625,77.375 U2.14
MCU_PA5: J3.3 U2.15 | length 11.6
  L1 (Signal) w0.2: J3.3 81.4,68.126 81.4,74.1 84.125,76.825 U2.15
MCU_PA6: J3.4 U2.16 | length 11.2
  L1 (Signal) w0.2: J3.4 82.725,73.875 84.625,75.775 U2.16
MCU_PA7: J3.5 U2.17 | length 10.9
  L1 (Signal) w0.2: J3.5 83.975,73.675 85.125,74.825 U2.17
MCU_SWCLK: J2.4 U2.37 | length 9.6
  L1 (Signal) w0.2: U2.37 88.635,85.26 88.635,86.06 89.675,87.1 92.175,87.1 94.225,89.15 J2.4
MCU_SWDIO: J2.2 U2.34 | length 12.2
  L1 (Signal) w0.2: U2.34 92.825,83.6 95.425,86.2 95.425,91.03 J2.2
MCU_SWO: J2.6 U2.39 | length 9.2
  L1 (Signal) w0.2: U2.39 87.625,86.325 89.75,88.45 91.65,88.45 92.955,89.755 J2.6
MCU_VCAP1: C13.2 U2.22 | length 1.7
  L1 (Signal) w0.25: 87.625,77.75 U2.22
  L1 (Signal) w0.3: C13.2@87.4,76.9 C13.2@87.462,76.962 ; C13.2 87.625,77 87.625,77.75
USB_D_N: J1.2 U2.32 | length 11.6
  L1 (Signal) w0.26: U2.32 89.54,82.6 89.558,82.618 100.757,82.618 J1.2
USB_D_P: J1.3 U2.33 | length 11.6
  L1 (Signal) w0.26: U2.33 89.54,83.1 89.558,83.082 100.757,83.082 J1.3
VBUS: C1.2 FB1.1 J1.1
XTAL_IN: C6.2 R6.1 Y1.4 | length 2.5
  L1 (Signal) w0.2: R6.1@78.387,80.85 78.444,80.794 78.444,80.431 78.479,80.396 C6.2 ; C6.2@78.467,79.637 78.467,78.421 Y1.4@78.525,78.362
pads on no net: J1.4 J1.6 J1.7 J1.8 J1.9 J1.10 J1.11 J2. J3.7 J3.8 U2.2 U2.3 U2.4 U2.10 U2.11 U2.12 U2.13 U2.18 U2.19 U2.20 U2.21 U2.25 U2.27 U2.28 U2.29 U2.30 U2.31 U2.38 U2.40 U2.41 U2.46 U3.2 U3.3 U3.4 U3.5 U3.6 U3.7 U3.14 U3.15 U3.16 U3.17 U3.19 U3.21 U3.22

## Polygon pours and split planes (outlines as drawn)
GND on L1 (Signal) "GND_L01_P010" (solid, pour order 10): 97.5,71.1 99.4,71.1 99.6,71.4 99.6,73.2 99.2,73.5 96.6,73.5 96.3,73.8 96.3,75.7 96.8,76.1 98.7,76.1 99.1,76.5 99.1,78.3 99,78.4 95.883,78.4 95.3,77.9 95,77.9 93.6,76.733 93.6,75.2 94.4,74.6 94.6,74.4 94.6,72.6 96,71.9 96.7,71.9
+3V3 on L1 (Signal) "+3V3_L01_P003" (solid, pour order 3): 91.225,66.675 95.1,66.675 97,68.575 99.725,68.575 100.025,68.875 100.025,70.15 99.725,70.45 94.9,70.45 94.15,71.2 94.15,74.475 93.85,74.775 92.475,74.775 92.25,74.55 92.25,70.85 90.875,69.475 90.875,67.025
+5V on L1 (Signal) "+5V_L01_P002" (solid, pour order 2): 96.2,80.3 94.625,80.3 93.875,79.55 93.875,78.575 93.025,77.725 91.625,77.725 90.9,77 90.875,77 90.875,75.7 90.025,74.85 90.025,73.325 90.175,73.175 91.6,73.175 91.75,73.325 91.75,74.65 92.075,74.975 92.85,74.975 93.05,75.175 93.05,76.775 93.7,77.3 94.2,77.8 94.725,78.275 94.725,79.325 95.25,79.725 96.2,79.725 96.2,78.775 96.325,78.65 97.4,78.65 97.525,78.775 97.525,81.2 97.4,81.325 97.4,81.35 96.375,81.35 96.2,81.175
VBUS on L1 (Signal) "VBUS_L01_P000" (solid, pour order 0): 98,82.15 97.725,81.875 97.725,78.925 97.925,78.725 98.975,78.725 99.175,78.925 99.175,81.275 99.475,81.575 101.575,81.575 101.725,81.725 101.725,82.05 101.625,82.15 100.225,82.15
GND on L2 (GND) "GND_L02_P004" (solid, pour order 4): 68.65,97.273 cw(c69.65,97.275) 69.65,98.275 101.11,98.275 cw(c101.11,95.735) 103.65,95.735 103.65,64.275 cw(c102.65,64.275) 102.65,63.275 70.65,63.275 cw(c70.65,65.275) 68.65,65.275
GND on L3 (GND) "GND_L03_P005" (solid, pour order 5): 68.65,97.273 cw(c69.65,97.275) 69.65,98.275 101.11,98.275 cw(c101.11,95.735) 103.65,95.735 103.65,64.275 cw(c102.65,64.275) 102.65,63.275 70.65,63.275 cw(c70.65,65.275) 68.65,65.275

## Silkscreen, mask and mechanical layers (free items; w line width, h text height)
Top Overlay:
  drawing of 49 lines, arcs and shapes, not listed
  text "SWD" at 90.95,88.2 h1.25
  text "Isaiah_O" at 69.8,83.225 h0.75 r90
  text "USB" at 99.85,77.25 h1.25
  text "GPIO" at 80.15,69.825 h1.25
Mechanical 1:
  lines w0.254: 67.35,63.57 ccw(c68.62,63.57) 68.62,62.3 103.68,62.3 ccw(c103.68,63.57) 104.95,63.57 104.95,97.73 ccw(c103.68,97.73) 103.68,99 69.925,99 68.62,99 ccw(c68.62,97.73) 67.35,97.73 67.35,63.57